# EAGLE board SS_rev02 (EAGLE 7.2.0)
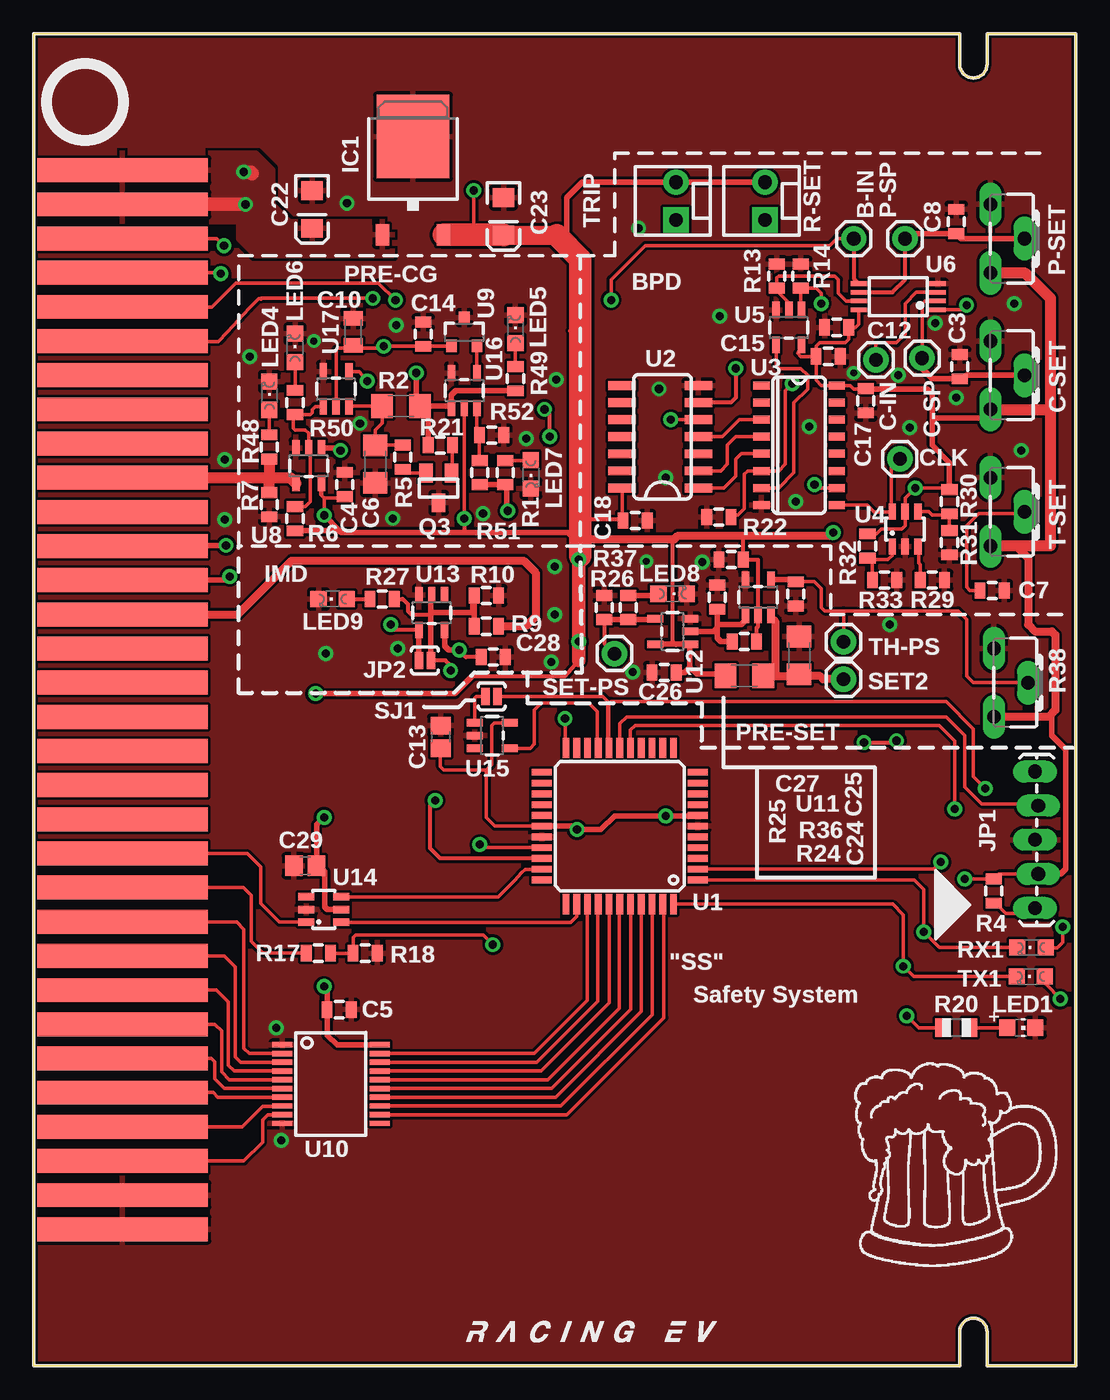
[diagram p0: board, top side]
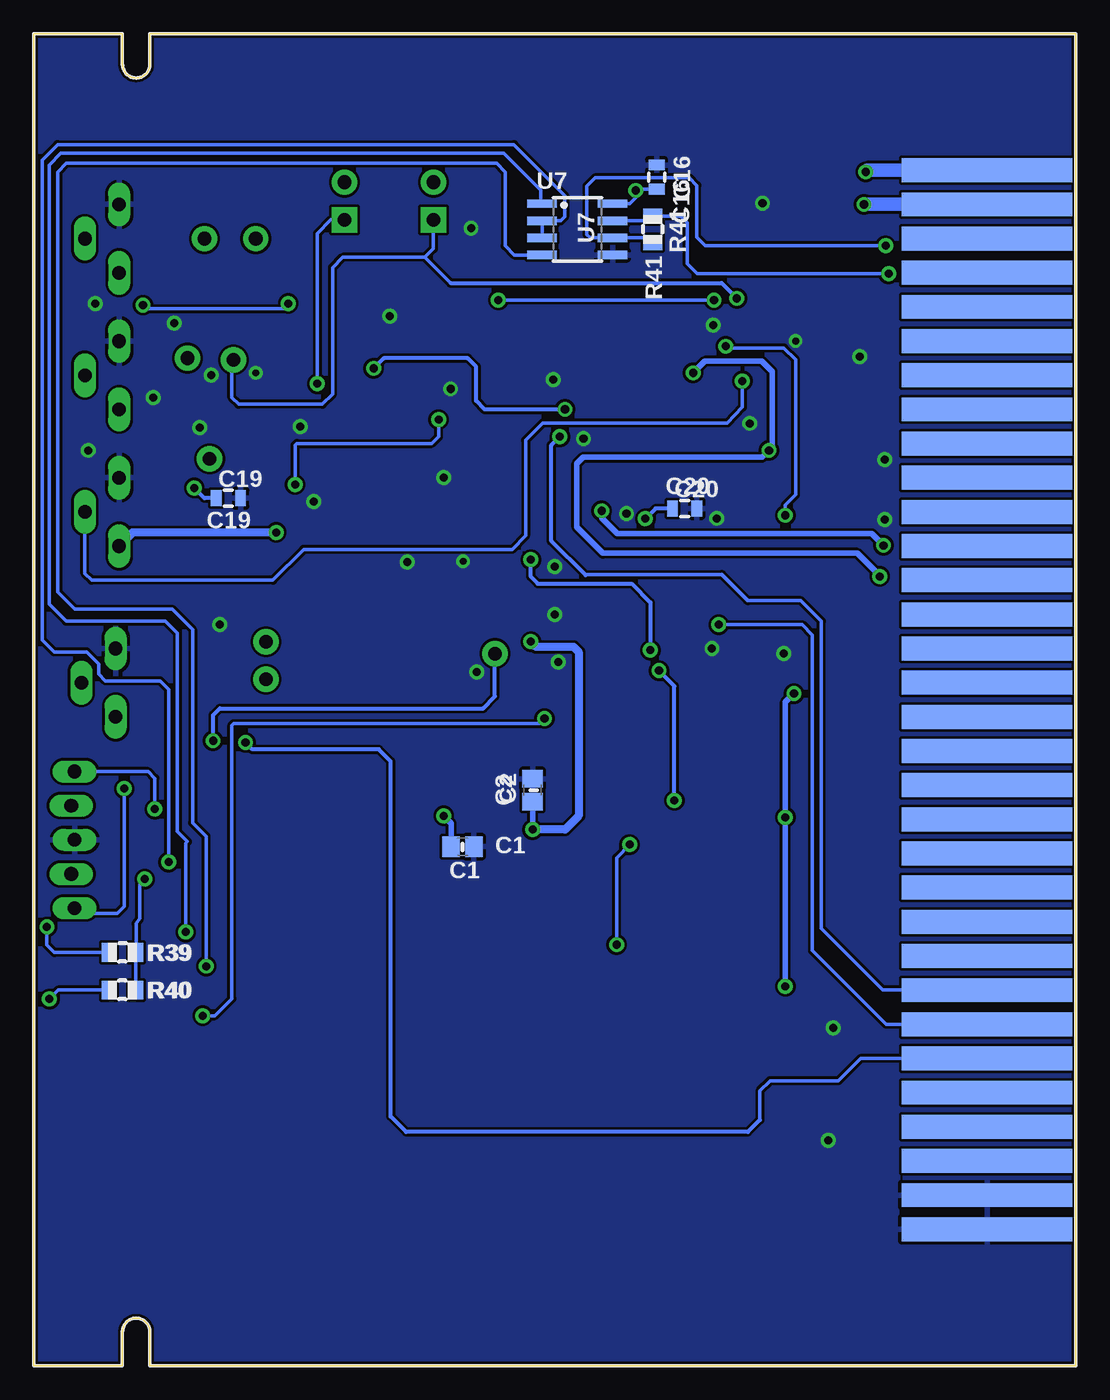
[diagram p1: board, bottom side, seen from below]

Size 77.47 x 99.06 mm. Coordinates in mm from the lower left corner, seen from the top.
Copper layers (1*16): Top 0.035mm / dielectric 1.5mm / Bottom 0.035mm
Design rules "SparkFun": minimum track width 8mil, minimum drill 20mil, track to track 8mil, track to pad 8mil, pad to pad 8mil, via to via 8mil, smd to smd 8mil, copper to edge 10mil, drill to drill 8mil, minimum pad ring 12mil, minimum via ring 10mil, stop-mask expansion 4mil, vias tented up to drill 25mil, thermal gap 10mil

## Footprints (pad centres in the part's own frame; a part is rotated, then mirrored left to right if it is on the bottom)
1X01 = drill 1.016 pad 1.88: 1 0,0
C0805 = smd 1.3 x 1.5: 1 -0.85,0; 2 0.85,0
0805 = smd 0.8 x 1.2: 1 -0.9,0; 2 0.9,0
1206 = smd 1.6 x 1.8: 1 -1.4,0; 2 1.4,0
C0805K = smd 1.1 x 1.4: 1 -1,0; 2 1,0
EIA3216 = smd 1.4 x 1.6: A 1.4,0; C -1.4,0
CARD-64 = smd 1.778 x 12.7: 1 10.16,6.604; 2 12.7,6.604; 3 15.24,6.604; 4 17.78,6.604; 5 20.32,6.604; 6 22.86,6.604; 7 25.4,6.604; 8 27.94,6.604; 9 30.48,6.604; 10 33.02,6.604; 11 35.56,6.604; 12 38.1,6.604; 13 40.64,6.604; 14 43.18,6.604; 15 45.72,6.604; 16 48.26,6.604; 17 50.8,6.604; 18 53.34,6.604; 19 55.88,6.604; 20 58.42,6.604; 21 60.96,6.604; 22 63.5,6.604; 23 66.04,6.604; 24 68.58,6.604; 25 71.12,6.604; 26 73.66,6.604; 27 76.2,6.604; 28 78.74,6.604; 29 81.28,6.604; 30 83.82,6.604; 31 86.36,6.604; 32 88.9,6.604 | smd 1.778 x 12.7 bottom: 33 10.16,6.604; 34 12.7,6.604; 35 15.24,6.604; 36 17.78,6.604; 37 20.32,6.604; 38 22.86,6.604; 39 25.4,6.604; 40 27.94,6.604; 41 30.48,6.604; 42 33.02,6.604; 43 35.56,6.604; 44 38.1,6.604; 45 40.64,6.604; 46 43.18,6.604; 47 45.72,6.604; 48 48.26,6.604; 49 50.8,6.604; 50 53.34,6.604; 51 55.88,6.604; 52 58.42,6.604; 53 60.96,6.604; 54 63.5,6.604; 55 66.04,6.604; 56 68.58,6.604; 57 71.12,6.604; 58 73.66,6.604; 59 76.2,6.604; 60 78.74,6.604; 61 81.28,6.604; 62 83.82,6.604; 63 86.36,6.604; 64 88.9,6.604
TO252 = smd 1 x 1.6: 1 -2.28,-4.8; 2 2.28,-4.8 | smd 5.4 x 6.2: 3 0,2.5
1X05_LOCK_LONGPADS = drill 1.016 long: 1 0,0; 2 2.54,-0.254; 3 5.08,0; 4 7.62,-0.254; 5 10.16,0
SJ_2S-NO = smd 0.635 x 1.27: 1 -0.45,0; 2 0.45,0
MOLEX-1X2_LOCK = drill 1.016 pad 1.88 square: 1 -0.127,0 | drill 1.016 pad 1.88: 2 2.667,0
CHIP-LED0805 = smd 1.2 x 1.2: A 0,-1.05; C 0,1.05
CHIPLED_0805 = smd 1.2 x 1.2: A 0,-1.05; C 0,1.05
SOT23 = smd 1 x 1.4: 1 -0.95,-1.1; 2 0.95,-1.1; 3 0,1.1
CA6H = drill 1.016 long: A -2.54,0; E 2.54,0; S 0,2.54
R0805 = smd 1.1 x 1.4: 1 -1,0; 2 1,0
TQFP-44 = smd 1.5 x 0.5: 1 -5.8,4; 2 -5.8,3.2; 3 -5.8,2.4; 4 -5.8,1.6; 5 -5.8,0.8; 6 -5.8,0; 7 -5.8,-0.8; 8 -5.8,-1.6; 9 -5.8,-2.4; 10 -5.8,-3.2; 11 -5.8,-4; 23 5.8,-4; 24 5.8,-3.2; 25 5.8,-2.4; 26 5.8,-1.6; 27 5.8,-0.8; 28 5.8,0; 29 5.8,0.8; 30 5.8,1.6; 31 5.8,2.4; 32 5.8,3.2; 33 5.8,4 | smd 0.5 x 1.5: 12 -4,-5.8; 13 -3.2,-5.8; 14 -2.4,-5.8; 15 -1.6,-5.8; 16 -0.8,-5.8; 17 0,-5.8; 18 0.8,-5.8; 19 1.6,-5.8; 20 2.4,-5.8; 21 3.2,-5.8; 22 4,-5.8; 34 4,5.8; 35 3.2,5.8; 36 2.4,5.8; 37 1.6,5.8; 38 0.8,5.8; 39 0,5.8; 40 -0.8,5.8; 41 -1.6,5.8; 42 -2.4,5.8; 43 -3.2,5.8; 44 -4,5.8
SO14 = smd 0.66 x 2.032: 1 -3.175,-2.68; 2 -1.905,-2.68; 3 -0.635,-2.68; 4 0.635,-2.68; 5 1.905,-2.68; 6 3.175,-2.68; 7 4.445,-2.68; 8 4.445,2.997; 9 3.175,2.997; 10 1.905,2.997; 11 0.635,2.997; 12 -0.635,2.997; 13 -1.905,2.997; 14 -3.175,2.997
SO-16 = smd 0.6 x 1.2: 1 -4.445,-2.8; 2 -3.175,-2.8; 3 -1.905,-2.8; 4 -0.635,-2.8; 5 0.635,-2.8; 6 1.905,-2.8; 7 3.175,-2.8; 8 4.445,-2.8; 9 4.445,2.8; 10 3.175,2.8; 11 1.905,2.8; 12 0.635,2.8; 13 -0.635,2.8; 14 -1.905,2.8; 15 -3.175,2.8; 16 -4.445,2.8
TSOT-23-6 = smd 1.2 x 0.55: 1 -1.3,0.95; 2 -1.3,0; 3 -1.3,-0.95; 4 1.3,-0.95; 5 1.3,0; 6 1.3,0.95
SOT23-5 = smd 0.55 x 1.2: 1 -0.95,-1.3; 2 0,-1.3; 3 0.95,-1.3; 4 0.95,1.3; 5 -0.95,1.3
TSSOP-8 = smd 1.2 x 0.35: 1 -2.925,0.975; 2 -2.925,0.325; 3 -2.925,-0.325; 4 -2.925,-0.975; 5 2.925,-0.975; 6 2.925,-0.325; 7 2.925,0.325; 8 2.925,0.975
SO-8 = smd 0.61 x 2.21: 1 -1.905,-2.616; 2 -0.635,-2.616; 3 0.635,-2.616; 4 1.905,-2.616; 5 1.905,2.616; 6 0.635,2.616; 7 -0.635,2.616; 8 -1.905,2.616
SOT-23 = smd 0.8 x 0.9: 1 -0.95,-0.23; 2 0.95,-0.23; 3 0,1.87
SSOP-20 = smd 0.4 x 1.5: 1 -2.925,-3.625; 2 -2.275,-3.625; 3 -1.625,-3.625; 4 -0.975,-3.625; 5 -0.325,-3.625; 6 0.325,-3.625; 7 0.975,-3.625; 8 1.625,-3.625; 9 2.275,-3.625; 10 2.925,-3.625; 11 2.925,3.625; 12 2.275,3.625; 13 1.625,3.625; 14 0.975,3.625; 15 0.325,3.625; 16 -0.325,3.625; 17 -0.975,3.625; 18 -1.625,3.625; 19 -2.275,3.625; 20 -2.925,3.625
SOT23-6 = smd 0.55 x 1.2: 1 0.95,-1.3; 2 0,-1.3; 3 -0.95,-1.3; 4 -0.95,1.3; 5 0,1.3; 6 0.95,1.3
SOT23-5L = smd 0.55 x 1.2: 1 -0.95,-1.3; 2 0,-1.3; 3 0.95,-1.3; 4 0.95,1.3; 5 -0.95,1.3

## Placement (x,y rotation side)
B-IN  TP  [1X01]  60.96,83.82 180 top
C1  .1uF  [C0805]  45.59,38.61 0 bottom
C2  .1uF  [C0805]  40.39,42.8 90 bottom
C3  1.0uF  [0805]  68.83,74.3 90 top
C4  0.1uF  [0805]  23.11,65.53 90 top
C5  1.0uF  [0805]  22.71,26.49 0 top
C6  100uF  [1206]  25.4,67.06 270 top
C7  1.0uF  [0805]  71.25,57.66 0 top
C8  1.0uF  [0805]  68.58,85.09 90 top
C10  0.1uF  [C0805K]  23.75,76.89 90 top
C12  0.1uf  [0805]  59.69,77.22 180 top
C13  0.1uF  [C0805]  30.25,46.76 90 top
C14  0.1uF  [0805]  28.96,76.71 90 top
C15  0.1uf  [0805]  59.05,75.06 0 top
C16  0.1uF  [0805]  31.17,88.39 90 bottom
C17  0.1uf  [0805]  61.85,71.75 270 top
C18  0.1uf  [0805]  44.7,62.87 0 top
C19  0.1uf  [0805]  62.99,64.52 0 bottom
C20  1.0uF  [0805]  29.08,63.75 0 bottom
C22  10uF  [EIA3216]  20.7,85.98 270 top
C23  10uF  [EIA3216]  34.92,85.47 270 top
C24  100uF  [1206]  56.9,52.83 90 top
C25  1.0uF  [0805]  56.64,57.4 270 top
C26  0.1uF  [0805]  46.86,51.56 180 top
C27  0.1uF  [0805]  51.84,59.94 180 top
C28  0.1uF  [0805]  34.16,52.71 0 top
C29  0.1uF  [C0805]  20.19,37.19 180 top
C-IN  TP  [1X01]  62.61,74.8 180 top
C-SP  TP  [1X01]  66.04,74.93 0 top
CARD1  CARD  [CARD-64]  0,99.06 270 top
CLK  TP  [1X01]  64.39,67.44 0 top
IC1  7805DT  [TO252]  28.19,88.9 0 top
JP1  [1X05_LOCK_LONGPADS]  74.42,34.04 90 top
JP2  [SJ_2S-NO]  29.08,52.45 0 top
JP11  BPR  [MOLEX-1X2_LOCK]  54.36,85.34 90 top
JP21  Trigger  [MOLEX-1X2_LOCK]  47.75,85.34 90 top
LED1  [CHIP-LED0805]  73.41,25.15 270 top
LED4  [CHIPLED_0805]  17.53,72.14 0 top
LED5  [CHIPLED_0805]  35.81,77.09 0 top
LED6  [CHIPLED_0805]  19.43,75.69 0 top
LED7  [CHIPLED_0805]  36.96,66.29 180 top
LED8  [CHIPLED_0805]  47.5,57.4 270 top
LED9  [CHIPLED_0805]  22.23,57.02 90 top
P-SP  TP  [1X01]  64.77,83.82 90 top
Q3  MMBT4403  [SOT23]  30.1,65.28 180 top
R1  2.0k  [0805]  35.05,66.42 270 top
R2  115k  [1206]  27.3,71.37 180 top
R3  [CA6H]  71.12,63.5 270 top
R4  10k  [0805]  71.37,35.31 90 top
R5  5  [0805]  27.43,67.56 90 top
R6  2.7k  [0805]  19.43,62.99 270 top
R7  2.7k  [0805]  17.53,64.03 90 top
R9  5k  [0805]  33.66,54.99 0 top
R10  5k  [0805]  33.66,57.28 180 top
R11  [CA6H]  71.12,73.66 270 top
R12  [CA6H]  71.12,83.82 270 top
R13  10k  [0805]  55.24,81.03 90 top
R14  10k  [0805]  57.02,81.03 90 top
R17  22k  [0805]  21.16,30.68 180 top
R18  10k  [0805]  24.64,30.68 180 top
R20  1k  [R0805]  68.58,25.15 180 top
R21  1k  [0805]  30.23,68.45 0 top
R22  10k  [0805]  50.93,63.12 0 top
R24  115k  [1206]  52.83,51.31 0 top
R25  2.7k  [0805]  50.8,57.15 270 top
R26  2.0k  [0805]  44.2,56.39 270 top
R27  1k  [0805]  25.91,57.02 0 top
R29  92k 1%  [0805]  66.8,58.42 0 top
R30  976k 1%  [0805]  68.07,64.26 90 top
R31  182k 1%  [0805]  68.07,61.21 90 top
R32  1k  [0805]  61.98,60.96 90 top
R33  1k  [0805]  63.25,58.42 180 top
R36  2.7k  [0805]  52.83,53.85 0 top
R37  2.7k  [0805]  42.42,56.39 270 top
R38  [CA6H]  71.37,50.8 270 top
R39  1K  [R0805]  70.87,30.73 0 bottom
R40  1k  [R0805]  70.87,27.94 0 bottom
R41  120  [R0805]  31.45,84.51 90 bottom
R48  2.0k  [0805]  17.53,68.33 270 top
R49  2.0k  [0805]  35.81,73.41 270 top
R50  1.0k  [0805]  19.43,71.63 270 top
R51  20k  [0805]  33.15,66.42 90 top
R52  28k  [0805]  34.04,69.22 0 top
RX1  RED  [CHIPLED_0805]  74.17,31.12 90 top
SET2  RC-PS  [1X01]  60.2,51.05 0 top
SET-PS  TP  [1X01]  43.18,52.96 0 top
SJ1  [SJ_2S-NO]  34.04,49.78 0 top
TH-PS  TP  [1X01]  60.2,53.85 270 top
TX1  GREEN  [CHIPLED_0805]  74.12,28.96 90 top
U1  PIC18F45K22  [TQFP-44]  43.56,40.13 180 top
U2  SN74HC21DR  [SO14]  46.74,68.45 90 top
U3  CD4015BM96  [SO-16]  56.9,68.45 270 top
U4  LTC6991  [TSOT-23-6]  64.77,62.23 90 top
U5  NC7SZ08P5X  [SOT23-5]  56.13,77.22 180 top
U6  LM358  [TSSOP-8]  64.26,79.5 180 top
U7  SN75HVD08DR  [SO-8]  37.06,84.51 270 bottom
U8  SN74AHC1G08  [SOT23-5]  20.45,66.93 180 top
U9  ISL21080  [SOT-23]  32,76.07 0 top
U10  MAX6818  [SSOP-20]  22.1,20.95 270 top
U11  MCP6541T-E/OT  [SOT23-5]  53.85,57.15 0 top
U12  SN74LVC1G132DBVR  [SOT23-5]  47.5,54.61 90 top
U13  NC7S14M5X  [SOT23-5]  29.59,56.01 180 top
U14  MAX6817EUT+T  [SOT23-6]  21.56,33.93 270 top
U15  MAX823  [SOT23-5L]  34.09,46.86 270 top
U16  MCP6541T-E/OT  [SOT23-5]  32,72.52 0 top
U17  MCP6541T-E/OT  [SOT23-5]  22.48,72.64 0 top
U$1  INDPK1  [PICKIT-PIN-1]  69.6,34.29 90 top
U$2  BEERM  [B-M]  61.04,7.39 0 top
U$3  LOGOM  [L-M]  24.64,-0.25 0 top

## Library data of the parts
B-IN C-IN C-SP CLK JP1 JP11 JP21 P-SP SET2 SET-PS TH-PS = SparkFun-Connectors
C1 C2 C10 C13 C29 IC1 LED1 LED4-LED9 R20 R39-R41 RX1 TX1 = adafruit
C3 C8 = SparkFun-Capacitors; PROD_ID: CAP-11625
C4 C5 C7 C12 C14-C20 C25-C28 JP2 R1 R4-R7 R9 R10 R17 R18 R21 R25-R27 R36 R37 R48-R50 SJ1 = SparkFun-Passives
C6 C24 = SparkFun-Capacitors
C22 C23 = SparkFun-Capacitors; PROD_ID: CAP-00811
CARD1 U1 U3-U5 U7 U8 U12 U13 = FSAE Eletric
Q3 = SparkFun-DiscreteSemi; PROD_ID: TRANS-09245
R2 R13 R14 R22 R24 R29-R33 R51 R52 = SparkFun-Resistors
R3 R11 R12 R38 = pot
U2 U6 U10 U14 U15 = NASA_LIB
U9 = DFT2
U11 U16 U17 = SparkFun-AnalogIC
U$1 = FSAE Eletric (2)
U$2 U$3 = Pic

## Nets
+5V: C1.1 C2.1 C4.1 C5.1 C10.1 C12.1 C13.1 C14.1 C15.1 C16.1 C17.1 C18.1 C19.1 C20.1 C23.A C26.1 C27.1 C28.1 C29.1 IC1.2 JP1.2 JP11.2 JP21.2 R3.E R4.2 R6.2 R11.E R12.E R24.1 R30.2 R32.2 R36.2 R38.E R39.2 R40.2 U1.7 U1.28 U2.14 U3.16 U4.5 U5.5 U6.8 U7.8 U8.5 U9.1 U10.20 U11.2 U12.1 U12.5 U13.5 U14.5 U15.5 U16.2 U17.2
+9V: C22.A CARD1.1 CARD1.2 CARD1.33 CARD1.34 IC1.1
AMD: CARD1.28 U10.7
AMD_O: U1.41 U10.14
AUX_O: U1.32 U14.4
BOTS: CARD1.29 U10.8
BOTS_O: U1.42 U10.13
BPD: CARD1.23 U10.2
BPD-R-SET: CARD1.57 U2.6
BPD_O: U1.36 U10.19
BRAKE_PRESURE: B-IN.1 CARD1.5 U6.5
CURRENT_SENSOR: C-IN.1 CARD1.6 JP21.1 U6.3
ECU: CARD1.30 U10.9
ECU_O: U1.43 U10.12
GND: C1.2 C2.2 C3.2 C4.2 C5.2 C6.2 C7.2 C8.2 C10.2 C12.2 C13.2 C14.2 C15.2 C16.2 C17.2 C18.2 C19.2 C20.2 C22.C C23.C C24.2 C25.2 C26.2 C27.2 C28.2 C29.2 CARD1.31 CARD1.32 CARD1.63 CARD1.64 IC1.3 JP1.3 LED1.C LED4.C LED5.C LED6.C LED7.C LED8.C LED9.C Q3.3 R3.A R7.1 R10.1 R11.A R12.A R13.2 R14.2 R18.1 R22.1 R25.1 R29.2 R31.1 R33.1 R37.1 R38.A R52.2 U1.6 U1.29 U2.7 U3.8 U4.2 U5.3 U6.4 U7.5 U8.3 U9.3 U10.1 U10.10 U11.5 U12.3 U13.3 U14.2 U15.2 U16.5 U17.5
IMD: CARD1.24 U10.3
IMD-R-SET: CARD1.58 JP2.1 U13.4
IMD-SIG: CARD1.14 R9.2
IMD_O: U1.37 U10.18
IMD_STAT: JP2.2 R9.1 R10.2 R27.2 U1.31 U13.2
IS_O: R17.1 R18.2 U1.30
MAIN: CARD1.10 R7.2 R48.2 U8.4
N$1: SJ1.1 U15.1
N$2: CARD1.22 R17.2
N$4: C25.1 R38.S TH-PS.1 U11.4
N$5: Q3.1 R21.2
N$6: Q3.2 R5.1
N$7: U2.5 U3.10
N$8: C7.1 R3.S U17.4
N$10: R30.1 R31.2 U4.4
N$11: U9.2 U16.4
N$12: R51.2 R52.1 U16.3
N$13: U3.7 U5.4
N$14: JP11.1 R22.2 U3.6
N$15: C24.1 R24.2 SET2.1 U11.3
N$16: LED1.A R20.1
N$17: U2.1 U3.5
N$18: U2.2 U3.4
N$19: U2.4 U3.3
N$20: R20.2 U1.22
N$21: R29.1 U4.3
N$22: CLK.1 U3.9 U4.6
N$23: C8.1 P-SP.1 R12.S U6.6
N$24: R25.2 R36.1 U11.1 U12.2
N$25: R32.1 R33.2 U4.1
N$26: C3.1 C-SP.1 R11.S U6.2
N$28: R14.1 U5.1 U6.1
N$29: LED8.A R26.1
N$30: R13.1 U5.2 U6.7
N$32: LED9.A R27.1
N$33: LED7.A R1.1
N$39: R40.1 TX1.A
N$40: JP1.4 U1.17
N$41: R39.1 RX1.A
N$43: JP1.5 U1.16
N$46: JP1.1 R4.1 SJ1.2 U1.18
N$59: C6.1 R2.2 R5.2 U17.3
N$62: R6.1 R50.2 U8.2 U17.1
N$63: LED4.A R48.1
N$65: LED5.A R49.1
N$67: LED6.A R50.1
RELAY-SET: CARD1.59 R26.2 R37.2 SET-PS.1 U12.4
RS-A: CARD1.3 R41.1 U7.6
RS-B: CARD1.4 R41.2 U7.7
RTG: CARD1.12 R1.2 R51.1
RX1: RX1.C U1.1 U7.1
SSW_C: CARD1.25 U10.4
SSW_C_O: U1.38 U10.17
SSW_L: CARD1.27 U10.6
SSW_L_O: U1.40 U10.15
SSW_R: CARD1.26 U10.5
SSW_R_O: U1.39 U10.16
START: CARD1.13 R2.1 R21.1 R49.2 U8.1 U16.1
TSMS: CARD1.21 U14.1
TSMS_O: U1.35 U14.6
TX1: TX1.C U1.44 U7.4
U7-RE/DE: U1.2 U7.2 U7.3
WDT: U1.19 U15.4

## Tracks (layer width: path | path; a pad name or v marks a point on that pad's centre or on a via)
+5V  (via drill 0.6)
  Top 0.254: U5.5 56.78,75.3 57.02,75.06 C15.1 | C15.1 58.16,73.29 58.55,72.9 U3.16 60.71,72.9 60.96,72.64 61.84,72.64 C17.1 | U6.8 61.34,77.47 61.09,77.22 C12.1 60.58,77.2 60.58,76.33 60.33,76.07 58.42,76.07 58.16,75.81 C15.1 | C14.1 31.02,75.81 U9.1 | C14.1 28.96,75.69 | 21.4,64.71 U8.5 21.4,65.72 21.34,65.79 21.34,64.77 21.4,64.71 | 21.4,64.71 21.59,64.52 | 21.59,64.52 23,64.52 C4.1 | C14.1 v26.02,75.81 25.91,75.69 23.62,75.69 22.61,75.69 22.48,75.56 U17.2 | 21.59,64.52 v21.59,63.25 | v65.53,65.28 64.77,64.52 U4.5 64.77,62.48 64.52,62.23 62.99,62.23 62.62,61.86 R32.2 | 65.91,65.28 67.96,65.28 R30.2 | U2.14 43.74,62.93 C18.1 | U16.2 v32,62.99 | 70.99,69.85 71.12,69.98 R11.E | U15.5 34.22,47.81 34.04,47.62 34.04,44.7 33.66,44.32 | 33.66,44.32 30.48,44.32 30.23,44.58 30.23,45.89 C13.1 | 33.66,44.32 33.66,40.77 34.29,40.13 U1.28 | JP1.2 71.74,36.58 R4.2 | R4.2 71.25,36.32 71.37,36.32 | v69.22,36.2 71.36,36.2 R4.2 | v32.72,87.4 32.72,84.53 32.28,84.1
  Top 0.305: 43.74,62.93 40.7,62.93 40.64,62.99 | 39.09,84.1 39.24,83.95 39.88,83.31 39.88,82.8 40.64,82.04 | 40.39,61.98 40.64,62.23 40.64,76.71 40.77,76.84 | 39.62,61.98 40.64,60.96 40.64,60.71 40.51,60.58 v40.51,59.94 40.51,60.2 | C28.1 32.13,52.71 v31.62,53.21 | U12.1 47.56,53.66 47.5,53.72 | R36.2 53.73,54.88 53.85,54.99 U11.2 53.85,59.94 C27.1 52.74,61.71 51.69,61.72 | 40.77,60.45 40.77,61.72 40.51,61.98 32,61.98 v32,62.99 | 28.32,50.04 31.37,50.04 32.54,51.21 32.64,51.31 39.5,51.31 40.51,52.45 | 39.88,76.96 40.64,77.72 | 48.77,53.59 47.75,53.59 47.5,53.85 47.5,61.34 47.88,61.72 | v65.53,65.28 65.91,65.28
  Top 0.406: 40.39,61.98 39.62,61.98 32,61.98 22.86,61.98 22.73,62.1 | 22.73,62.1 v21.59,63.25 | R6.2 22.72,62.09 22.73,62.1 | JP11.2 JP21.2 40.77,88.01 39.62,86.87 39.62,84.33 39.24,83.95 | U13.5 30.54,53.53 30.86,53.21 v31.62,53.21 | U12.5 U12.1 48.77,53.63 48.77,53.59 48.77,51.94 | R24.1 51.56,51.44 49.27,51.44 48.77,51.94 | C26.1 48.39,51.56 48.77,51.94 | U1.28 40.13,40.13 v40.39,39.88 42.16,39.88 43.18,40.89 v46.99,40.89 49.32,40.89 U1.7 | 75.69,48.51 75.69,46.86 76.71,45.85 76.71,36.96 76.33,36.58 JP1.2 | 61.84,72.64 66.42,72.64 66.8,72.26 66.8,70.48 66.93,70.48 | R30.2 68.07,67.18 66.8,68.45 66.8,70.36 66.93,70.48 | 66.93,70.48 70.48,70.48 R11.E | C10.1 23.75,75.82 23.62,75.69 | U10.20 22.55,23.88 21.81,24.57 C5.1 21.81,28 v21.59,28.22 | v20.95,49.99 31.32,49.99 32.54,51.21 | v21.59,40.79 21.04,40.25 C29.1 21.21,37.19 21.64,36.75 21.64,34.11 21.82,33.93 U14.5
  Top 0.61: R3.E 73.03,60.96 73.91,60.07 73.91,55.12 74.42,54.61 75.69,54.61 75.95,54.36 75.95,48.77 75.69,48.51 75.44,48.26 R38.E | 40.64,61.47 47.62,61.47 47.88,61.72 51.69,61.72 59.18,61.72 v59.44,61.98
  Top 0.813: R12.E 73.66,81.28 75.56,79.38 75.56,71.25 | 75.56,71.25 75.56,60.96 R3.E | R11.E 75.44,71.12 75.56,71.25
  Top 1.016: 40.51,52.45 v40.51,53.85 v40.51,59.94
  Top 1.422: C23.A 38.87,84.07
  Top 1.676: 38.87,84.07 40.64,82.3 40.64,82.04 40.64,77.72 40.64,76.71 40.64,62.99 40.64,61.47 40.64,60.71 40.64,60.2 | IC1.2 32.28,84.1 34.9,84.1 C23.A
  Bottom 0.254: v21.59,63.25 21.59,64.01 20.83,64.77 20.83,74.81 21.71,75.69 25.91,75.69 v26.02,75.81 | v69.22,36.2 69.6,35.81 69.6,33.27 69.85,32.89 69.85,30.75 R39.2 R40.2 | U7.8 33.17,86.41 32.72,86.87 v32.72,87.4 32.62,87.49 C16.1
  Bottom 0.305: v31.62,53.21 31.62,56.77 33.02,58.17 40.01,58.17 40.51,58.67 v40.51,59.94 | C20.1 31.24,63.75 v32,62.99 | C19.1 64.77,64.52 v65.53,65.28
  Bottom 0.406: v40.39,39.88 C2.1 | C1.1 46.44,40.35 v46.99,40.89 | v21.59,28.22 v21.59,40.79 21.59,49.35 v20.95,49.99
  Bottom 0.61: v40.51,53.85 40.13,53.47 37.34,53.47 36.96,53.09 36.96,40.89 37.97,39.88 v40.39,39.88 | v59.44,61.98 70.1,61.98 R3.E
+9V  (via drill 0.6)
  Top 1.016: v15.62,88.77 16.13,88.77 16.26,88.65 | CARD1.34 v15.75,86.36
  Bottom 1.016: CARD1.33 15.49,88.9 v15.62,88.77 | v15.75,86.36 CARD1.34
  pour Top: 6.35,90.17 16.51,90.17 17.78,88.9 17.78,86.36 19.05,85.09 26.67,85.09 26.67,82.55 16.51,82.55 15.24,83.82 15.24,85.09 6.35,85.09
AMD
  Top 0.254: U10.7 13.68,19.98 13.34,20.32 CARD1.28
AMD_O
  Top 0.254: U10.14 38.8,19.98 45.16,26.34 U1.41 | U1.41
AUX_O
  Top 0.254: U14.4 34.53,34.88 35.71,36.07 36.3,36.68 36.52,36.91 37.73,36.91 U1.32
BOTS
  Top 0.254: CARD1.29 15.49,17.78 17.02,19.3 18.45,19.3 U10.8
BOTS_O
  Top 0.254: U10.13 39.19,19.33 45.97,26.11 45.97,34.32 U1.42
BPD
  Top 0.254: U10.2 16.01,23.23 15.62,23.62 15.62,32.46 15.09,33 6.63,33 CARD1.23
BPD-R-SET  (via drill 0.6)
  Top 0.305: v38.35,69.09 38.35,70.74 v37.97,71.12 | v52.2,74.17 52.2,72.01 51.82,71.63 U2.6
  Bottom 0.254: CARD1.57 14.35,27.94 18.92,32.51 18.92,55.37 20.45,56.9 24.38,56.9 24.42,56.93
  Bottom 0.305: 24.42,56.93 26.31,58.83 36.45,58.8 38.99,61.34 38.99,68.45 v38.35,69.09 | v37.97,71.12 43.94,71.12 44.58,71.75 44.58,74.3 45.21,74.93 51.44,74.93 v52.2,74.17
BPD_O
  Top 0.254: U10.19 37.2,23.23 41.15,27.18 41.15,34.32 U1.36
BRAKE_PRESURE  (via drill 0.6)
  Top 0.254: B-IN.1 59.69,83.82 59.18,83.31 45.47,83.31 42.93,80.77 v42.93,79.25 | v26.9,79.25 25.63,80.52 15.01,80.52 13.23,78.74 CARD1.5
  Top 0.305: B-IN.1 60.96,80.85 U6.5
  Bottom 0.254: v26.9,79.25 v42.93,79.25
CURRENT_SENSOR  (via drill 0.6)
  Top 0.254: U6.3 65.6,79.83 64.77,78.99 64.77,76.71 64.14,76.07 62.74,76.07 62.61,75.95 C-IN.1 | 16.89,79.35 16.74,79.35 16.03,78.64 14.4,76.86 13.72,76.17 6.63,76.17 CARD1.6
  Top 0.305: v25.2,79.38 16.89,79.35
  Bottom 0.254: JP21.1 47.75,83.06 48.39,82.42 | 48.39,82.42 54.48,82.42 55.24,81.66 55.24,72.26 56.01,71.5 62.23,71.5 62.74,72.01 62.74,74.68 C-IN.1 | 46.48,80.52 48.39,82.42
  Bottom 0.305: 46.48,80.52 26.34,80.52 v25.2,79.38
ECU
  Top 0.254: CARD1.30 15.62,15.24 17.02,16.64 17.02,18.29 17.4,18.67 18.46,18.67 U10.9
ECU_O
  Top 0.254: U10.12 39.63,18.68 46.84,25.88 46.84,34.25 U1.43
GND  (via drill 0.5, 0.6)
  Top 0.254: LED8.C 48.64,57.4
  other vias: 51,78.05 33.4,63.37 26.95,77.39 38.84,73.33 14.2,62.94 24.26,70.08 20.83,76.2 46.99,66.04 46.48,72.64 56.64,64.26 65.13,69.77 57.66,69.85 67.03,77.52 60.96,73.84 72.9,78.99 73.41,68.07 63.63,55.12 44.96,84.58 49.71,59.77 18.03,25.15 18.41,16.76 64.26,73.66 45.54,59.82 38.73,55.88 21.72,52.96 27.05,53.34 44.53,51.59 68.58,72.01 16.08,75.06 14.2,67.39 38.73,59.44 38.48,52.32 23.29,86.46 26.7,63.02 36.6,68.96
  pour Top (rank 5): 0,99.06 77.47,99.06 77.47,0 0,0
  pour Bottom: 0,99.06 77.47,99.06 77.47,0 0,0
IMD
  Top 0.254: U10.3 15.39,22.58 14.99,22.99 14.99,29.67 14.17,30.48 CARD1.24
IMD-R-SET  (via drill 0.6)
  Top 0.305: v26.54,55.12 26.54,54.99 26.8,54.74 28.61,54.74 U13.4
  Top 0.406: JP2.1 U13.4
  Bottom 0.254: CARD1.58 14.1,25.4 19.58,30.89 19.58,54.36 20.34,55.12 v26.54,55.12
IMD-SIG
  Top 0.61: CARD1.14 15.19,55.88 19.18,59.87 36.42,59.87 37.31,58.98 37.31,55.73 36.58,54.99 R9.2
IMD_O
  Top 0.254: U10.18 37.41,22.58 41.94,27.1 41.94,34.31 U1.37
IMD_STAT  (via drill 0.6)
  Top 0.305: R27.2 27.43,57.02 27.81,56.64 27.81,56.13 28.07,55.88 29.41,55.88 29.53,56.01 | U1.31 30.21,37.73 29.46,38.48 29.46,41.66 v29.84,42.04 | v30.99,51.69 30.99,52.07 30.61,52.45 JP2.2
  Top 0.406: R9.1 R10.2 32.64,57.28 32.64,56.01 29.53,56.01 | U13.2 29.53,57.31 29.53,56.01 | 29.53,56.01 JP2.2
  Bottom 0.305: v29.84,42.04 29.84,50.55 v30.99,51.69
IS_O  (via drill 0.6)
  Top 0.254: R17.1 R18.2 23.74,31.87 23.93,32.06 33.4,32.06 v34.14,31.32 | v33.17,38.76 33.38,38.53 U1.30 | U1.30
  Bottom 0.254: v34.14,31.32 34.14,37.77 v33.17,38.76
MAIN
  Top 0.254: 17.52,65.15 R7.2
  Top 0.813: CARD1.10 17.55,66.04 | 17.55,66.04 17.75,66.04 | 17.75,66.04 19.09,66.04 U8.4 | R7.2 17.53,66.02 17.55,66.04 | R48.2 17.53,66.27 17.75,66.04
N$1
  Top 0.254: U15.1 32.79,49.68 32.89,49.78 SJ1.1
N$2
  Top 0.254: CARD1.22 15.6,35.56 16.18,34.98 16.18,31.57 17.04,30.71 20.23,30.71 R17.2
N$4
  Top 0.254: C25.1 58.03,58.3 58.55,57.79 58.55,56.39 58.8,56.13 60.2,56.13 | 60.2,56.13 68.71,56.13 69.34,55.5 69.34,51.31 69.85,50.8 R38.S | TH-PS.1 60.2,56.13
  Top 0.406: U11.4 56.5,58.45 C25.1
N$5
  Top 0.254: R21.2 31.13,66.46 Q3.1
N$6
  Top 0.254: Q3.2 27.72,66.38 R5.1
N$7  (via drill 0.6)
  Top 0.254: U2.5 49.91,70.36 50.04,70.23 49.54,70.23 U2.5 | U3.10 58.29,65.28 v58.04,65.53 | v47.37,70.36 U2.5
  Bottom 0.254: v58.04,65.53 58.04,68.45 57.91,68.58 47.88,68.58 47.37,69.09 v47.37,70.36
N$8  (via drill 0.6)
  Top 0.254: C7.1 69.6,57.66 69.34,57.91 69.34,62.48 70.23,63.37 73.53,63.37 R3.S | U17.4 24.2,73.94 v24.79,73.23
  Bottom 0.254: v24.79,73.23 24.79,71.27 25.91,70.1 39.62,70.1 40.89,68.83 40.89,61.72 41.91,60.71 57.4,60.71 59.69,58.42 73.15,58.42 73.66,58.93 R3.S
N$10
  Top 0.254: U4.4 66.52,63.53 66.8,63.25 67.96,63.25 R30.1 R31.2
N$11
  Top 0.254: U9.2 U16.4
N$12
  Top 0.254: U16.3 32.95,69.4 R52.1 33.14,67.33 R51.2
N$13
  Top 0.254: U5.4 55.18,74.44 55.45,74.17 57.02,74.17 57.53,73.66 57.53,72.64 56.52,71.63 56.52,66.42 55.37,65.28 U3.7
N$14  (via drill 0.6)
  Top 0.254: v56.39,73.03 55.88,72.52 55.88,67.06 55.37,66.55 U3.6 53.09,66.55 52.83,66.29 52.83,63.75 52.32,63.25 51.95,63.25 R22.2
  Bottom 0.254: JP11.1 55.37,85.22 56.39,84.2 v56.39,73.03
N$15
  Top 0.61: SET2.1 58.67,51.05 58.42,51.31 57.02,51.31 C24.1 56.77,51.31 R24.2 55.12,51.3 55.12,55.37 54.8,55.69 U11.3
N$16
  Top 0.254: LED1.A R20.1
N$17
  Top 0.254: U3.5 52.58,67.82 52.2,67.44 52.2,66.17 51.31,65.28 U2.1
N$18
  Top 0.254: U3.4 52.2,69.09 51.56,68.45 51.56,67.06 51.05,66.55 U2.2
N$19
  Top 0.254: U3.3 52.45,70.36 51.18,69.09 U2.4
N$20  (via drill 0.6)
  Top 0.254: R20.2 65.79,25.15 v64.9,26.03 | v39.5,48.13 39.5,46 U1.22
  Bottom 0.254: v64.9,26.03 64.01,26.03 62.74,27.31 62.74,47.62 62.61,47.75 39.88,47.75 v39.5,48.13
N$21
  Top 0.254: R29.1 65.9,59.57 65.79,59.69 65.79,60.86 U4.3
N$22
  Top 0.254: U3.9 61.98,64.01 62.48,63.5 63.79,63.5 U4.6 63.75,63.6 63.75,66.8 CLK.1
N$23
  Top 0.305: U6.6 63.83,79.83 64.77,80.77 P-SP.1
  Top 0.406: R12.S 68.95,83.82 C8.1 65.14,84.19 P-SP.1
N$24
  Top 0.406: U12.2 50.55,54.61 50.8,54.86 | 50.8,54.86 50.8,55.12 | 50.8,55.12 R25.2 | R36.1 51.05,53.85 50.8,54.1 50.8,54.86 | U11.1 52.9,55.44 52.58,55.12 50.8,55.12
N$25
  Top 0.254: U4.1 63.82,60.26 63.5,59.94 62.09,59.94 R32.1 62.35,59.69 R33.2
N$26
  Top 0.254: U6.2 66.22,79.18 66.04,78.99 C-SP.1
  Top 0.406: R11.S 69.34,73.66 68.97,73.29 C3.1 68.46,73.41 66.8,73.41 66.04,74.17 C-SP.1
N$28  (via drill 0.6)
  Top 0.254: U5.1 57.06,78.88 57.02,79.12 R14.1 57.03,80.14 58.17,80.14 58.55,79.76 v58.55,78.99 | U6.1 69,78.53 v69.34,78.87
  Bottom 0.254: v69.34,78.87 69.22,78.87 68.96,78.61 58.93,78.61 v58.55,78.99
N$29
  Top 0.406: R26.1 46.7,57.29 LED8.A
N$30
  Top 0.254: U5.2 56.13,79.05 55.24,79.93 R13.1 55.24,80.9 55.37,81.03 59.56,81.03 59.82,80.77 59.82,79.76 60.4,79.18 U6.7
N$32
  Top 0.305: LED9.A R27.1
N$33
  Top 0.254: R1.1 36.93,67.32 LED7.A
N$39  (via drill 0.6)
  Top 0.254: v76.3,27.28 76.3,27.31 75.26,28.35 75.26,28.86 TX1.A
  Bottom 0.254: R40.1 75.64,27.94 v76.3,27.28
N$40
  Top 0.254: U1.17 43.56,47.75 44.07,48.26 67.82,48.26 69.22,46.86 69.22,43.05 70.48,41.78 74.55,41.78 JP1.4
N$41  (via drill 0.6)
  Top 0.254: v76.48,32.64 76.48,31.5 76.07,31.09 75.24,31.09 RX1.A
  Bottom 0.254: R39.1 75.92,30.73 76.5,31.32 76.5,32.61 v76.48,32.64
N$43  (via drill 0.6)
  Top 0.254: U1.16 44.36,47.28 44.7,47.62 67.31,47.62 68.45,46.48 v68.45,41.4
  Bottom 0.254: v68.45,41.4 68.45,43.69 68.96,44.2 JP1.5
N$46  (via drill 0.6)
  Top 0.254: SJ1.2 42.29,49.78 42.67,49.4 42.67,46.02 U1.18 42.76,49.24 42.93,49.4 67.82,49.4 69.85,47.37 69.85,43.82 v70.74,42.93 | R4.1 71.51,34.41 72.26,33.66 74.04,33.66 JP1.1
  Bottom 0.254: v70.74,42.93 70.74,34.16 71.25,33.66 74.04,33.66 JP1.1
N$59
  Top 0.254: U17.3 23.46,71.37 R2.2 25.91,70.1 25.4,69.6 C6.1 R5.2
N$62
  Top 0.254: U8.2 20.45,69.34 20.19,69.6 19.43,69.6 19.3,69.72 19.3,70.6 R50.2 19.44,70.74 20.57,70.74 20.7,70.87 20.7,71.12 20.93,71.34 U17.1 | U8.2 20.48,68.23 20.57,68.33 | R6.1 20.2,63.89 20.57,64.26 20.57,68.1 U8.2
N$63
  Top 0.254: LED4.A R48.1
N$65
  Top 0.254: R49.1 LED5.A
N$67
  Top 0.254: R50.1 LED6.A
RELAY-SET  (via drill 0.6)
  Top 0.305: v61.72,46.36 64.01,46.36 v64.14,46.48 | R37.2 42.42,53.72 SET-PS.1
  Top 0.406: R37.2 R26.2 46.2,55.49 U12.4
  Bottom 0.254: CARD1.59 16,22.86 17.65,21.21 22.73,21.21 23.5,20.45 23.5,18.29
  Bottom 0.305: 23.5,18.29 24.38,17.4 49.78,17.4 50.93,18.54 50.93,44.96 51.82,45.85 61.21,45.85 v61.72,46.36 | v64.14,46.48 64.14,48.39 63.63,48.9 44.07,48.9 43.18,49.78 SET-PS.1
RS-A  (via drill 0.6)
  Top 0.254: 9.3,83.82 13.61,83.82 v14.15,83.29
  Top 0.406: CARD1.3 9.3,83.82 9.3,83.62
  Bottom 0.254: R41.1 31.81,83.87 U7.6 36.09,83.87 36.35,84.12 36.35,87.73 35.74,88.34 28.75,88.34 28.17,87.76 28.17,83.92 27.53,83.29 v14.15,83.29
RS-B  (via drill 0.6)
  Top 0.254: CARD1.4 13.84,81.28 v13.92,81.2
  Bottom 0.254: U7.7 31.81,85.14 R41.2 31.44,85.5 29.39,85.5 28.91,85.01 28.91,81.97 28.14,81.2 v13.92,81.2
RTG  (via drill 0.6)
  Top 0.406: R1.2 R51.1 34.96,65.52 35.15,65.33 35.15,63.68 v35.26,63.58 | v14.3,61.01 6.66,61.01 CARD1.12
  Bottom 0.406: v35.26,63.58 35.26,63.04 34.09,61.87 15.16,61.87 v14.3,61.01
RX1  (via drill 0.6)
  Top 0.254: U1.1 65.47,36.13 66.17,35.43 v66.17,32.26 67.31,31.12 RX1.C
  Bottom 0.254: v66.17,32.26 66.17,38.86 66.04,38.99 66.8,39.75 66.8,54.48 67.69,55.37 75.06,55.37 76.33,56.64 76.33,89.28 75.44,90.17 42.55,90.17 39.78,87.4 39.78,86.51 U7.1
SSW_C
  Top 0.254: U10.4 14.9,21.93 14.48,22.35 14.48,27.05 13.59,27.94 CARD1.25
SSW_C_O
  Top 0.254: U10.17 37.73,21.93 42.77,26.98 42.77,34.32 U1.38
SSW_L
  Top 0.254: U10.6 14.17,20.63 13.46,21.34 13.46,22.61 13.21,22.86 CARD1.27
SSW_L_O
  Top 0.254: U10.15 38.51,20.63 44.4,26.52 44.4,34.29 U1.40
SSW_R
  Top 0.254: U10.5 14.53,21.28 13.97,21.84 13.97,24.89 13.46,25.4 CARD1.26
SSW_R_O
  Top 0.254: U10.16 38.22,21.28 43.54,26.59 43.54,34.31 U1.39
START  (via drill 0.6)
  Top 0.406: R49.2 31.36,72.51 31.04,72.19 31.04,71.23 U16.1 30.9,71.37 R2.1 | R21.1 29.33,70.75 R2.1 | U8.1 22.65,68.23 v22.81,68.07 | v28.45,73.84 28.45,71.63 R2.1 | CARD1.13 14.3,58.42 v14.58,58.7
  Bottom 0.406: v28.45,73.84 27.58,74.7 23.34,74.7 22.58,73.94 22.58,68.4 22.81,68.17 v22.81,68.07 23.32,67.56 36.6,67.56 37.08,67.08 37.08,62.36 35.15,60.43 16.26,60.43 14.58,58.75 v14.58,58.7
TSMS
  Top 0.254: CARD1.21 15.88,38.1 16.87,37.11 16.87,34.39 18.26,33 20.25,33 U14.1
TSMS_O
  Top 0.254: U14.6 39.92,32.98 40.36,33.43 U1.35 | U1.35
TX1  (via drill 0.6)
  Top 0.254: U1.44 63.84,34.33 64.64,33.53 v64.64,29.72 65.41,28.96 TX1.C
  Bottom 0.254: v64.64,29.72 64.64,39.37 65.66,40.39 65.66,54.74 67.18,56.26 74.42,56.26 75.69,57.53 75.69,88.77 75.06,89.41 43.05,89.41 42.42,88.77 42.42,83.29 41.73,82.6 U7.4
U7-RE/DE  (via drill 0.6)
  Top 0.254: U1.2 66.9,36.93 v67.44,37.47
  Bottom 0.254: v67.44,37.47 67.44,50.29 68.07,50.93 72.14,50.93 72.64,51.44 72.64,52.2 73.53,53.09 75.95,53.09 76.83,53.98 76.83,89.66 75.69,90.81 41.78,90.81 38,87.02 38,85.45 38.3,85.14 U7.2 U7.3
WDT
  Top 0.254: U15.4 36.9,45.91 37.21,46.23 37.21,48.77 37.72,49.28 41.27,49.28 41.91,48.64 41.91,45.98 U1.19

## Text on the board
tPlace: TRIP | R-SET | PRE-CG | P-SET | BPD | C-SET | T-SET | IMD | PRE-SET | "SS" | Safety System
_tsilk: IC1 | C22 | TRIP | B-IN | P-SP | C23 | R-SET | C8 | R13 | R14 | U6 | PRE-CG | P-SET | C10 | C14 | BPD | U5 | LED6 | U17 | U9 | C12 | C3 | LED5 | U2 | R49 | C15 | LED4 | U3 | R2 | U16 | C-IN | C-SP | R52 | C-SET | R48 | R50 | R21 | CLK | C17 | R5 | C6 | R1 | C4 | LED7 | U4 | R7 | R30 | U8 | Q3 | R22 | R6 | R51 | C18 | R32 | T-SET | LED8 | U13 | R37 | R31 | IMD | R27 | R10 | R26 | C7 | LED9 | R9 | R33 | R29 | C28 | U12 | TH-PS | R38 | JP2 | SET-PS | C26 | SET2 | SJ1 | C13 | PRE-SET | U15 | C27 | R25 | U11 | C25 | JP1 | C29 | R36 | C24 | R24 | U14 | U1 | R4 | RX1 | R17 | R18 | "SS" | TX1 | Safety System | R20 | C5 | + | LED1 | U10
_bsilk: C16 | U7 | R41 | C20 | C19 | C2 | C1 | R39 | R40